# Altium PCB ESP32.PcbDoc
Units mil, origin at the board's own origin, x right, y up, seen from the top; angles counter-clockwise.
Board outline 1320 x 1320 mil, 2 copper layers (Top Layer, Bottom Layer); 27 components, 49 nets, 191 pads, 36 vias.
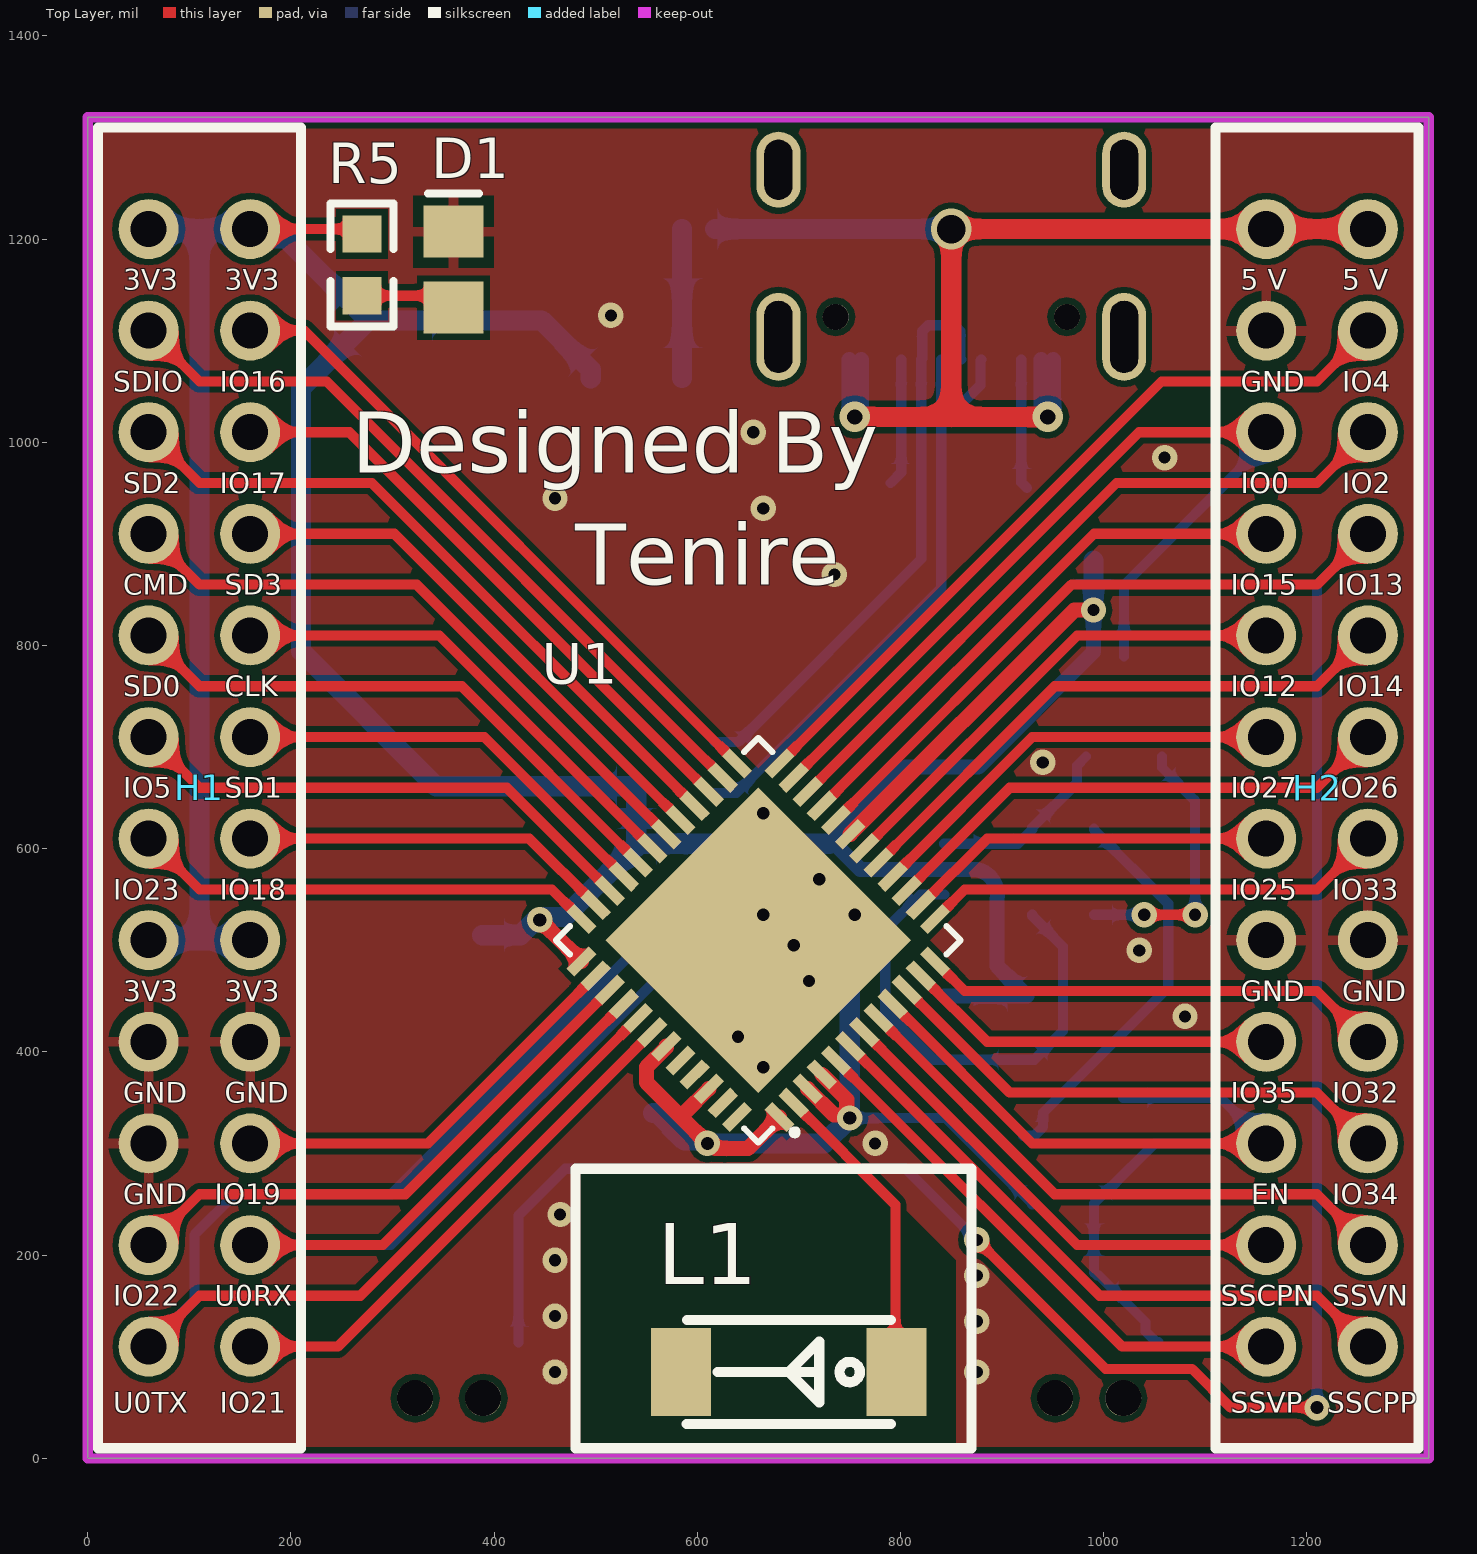
[diagram p0: Top Layer view]
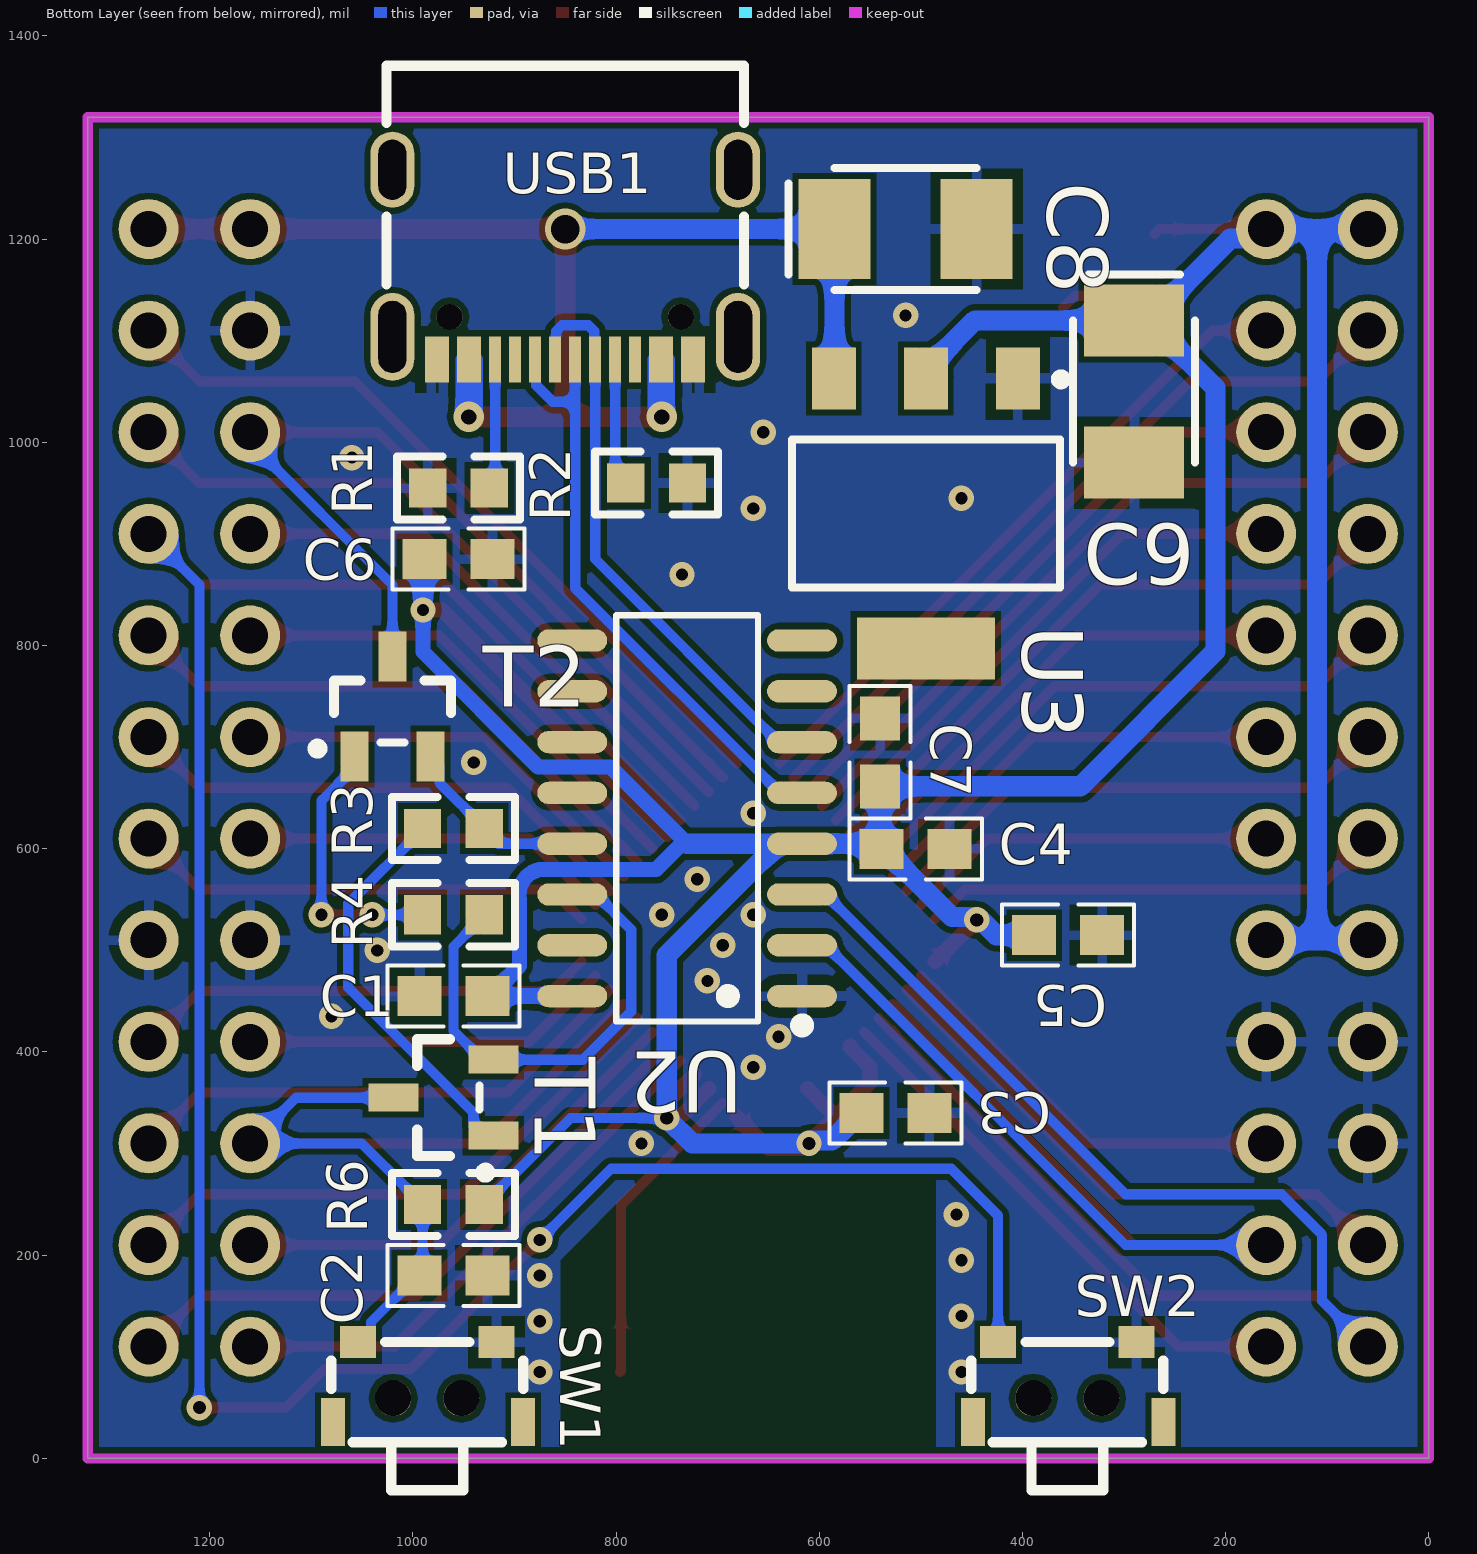
[diagram p1: Bottom Layer view, seen from below]

## Layer stack, top to bottom
Top Solder: solder mask 0.4, Solder Resist, Dk 3.5
Top Layer: signal copper 1.4
Dielectric 1: dielectric 12.6, FR-4, Dk 4.8
Bottom Layer: signal copper 1.4
Bottom Solder: solder mask 0.4, Solder Resist, Dk 3.5

## Board outline
0,0 0,1320 1320,1320 1320,0

## Design rules (kind name [scope] priority, off if disabled: settings)
Clearance [All] p1: gap=6 ignorepadtopadclearanceinfootprint=TRUE except(0: Arc-Hole Track-Hole SMDPad-Hole THPad-Hole Via-Hole Fill-Hole Poly-Hole Region-Hole Text-Hole)
HoleSize [All] p1: absolutevalues=TRUE maxlimit=248 minlimit=8 maxpercent=80.000 minpercent=20.000
MinimumSolderMaskSliver [All] p1: minsoldermaskwidth=0
PolygonConnect [All] p1: thpad.connectstyle=Relief thpad.reliefconductorwidth=10 thpad.reliefentries=4 thpad.polygonreliefangle="90 Angle" thpad.airgapwidth=10 smdpad.connectstyle=Relief smdpad.reliefconductorwidth=10 smdpad.reliefentries=4 smdpad.polygonreliefangle="90 Angle" smdpad.airgapwidth=10 via.connectstyle=Direct via.reliefconductorwidth=10 via.reliefentries=4 via.polygonreliefangle="90 Angle" via.airgapwidth=10
RoutingVias [All] p1: holewidth=16 width=28 viastyle="Through Hole" minholewidth=12 minwidth=25 maxholewidth=24 maxwidth=40
SilkToSilkClearance [All] p1: silktosilkclearance=0
SilkToSolderMaskClearance [IsPad] p1: minsilkscreentomaskgap=0 clearancetoexposedcopper=TRUE
SolderMaskExpansion [All] p1: expansion=4 istentingtop=FALSE
UnRoutedNet [All] p1: checkbadconnections=TRUE
Width [All] p1: maxlimit=60 minlimit=10 preferedwidth=10 minimp=50.000000 maximp=50.000000 favimp=50.000000
25 further rules are at their usual default settings.

## Components (designator, comment, footprint, x,y, rotation, side; value= is the part's Value field where it differs from the comment)
C1 "Cap" 0603-C 960,455 r0 bottom value=0.1μF
C2 "Cap" 0603-C 960,180 r180 bottom value=10μF
C3 "Cap" 0603-C 525,340 r180 bottom value=0.1μF
C4 "Cap" 0603-C 505,600 r180 bottom value=0.1μF
C5 "Cap" 0603-C 355,515 r180 bottom value=0.1μF
C6 "Cap" 0603-C 955,885 r180 bottom value=0.1μF
C7 "Cap" 0603-C 540,695 r90 bottom value=10μF
C8 "Cap Pol" CAP-3528 515,1210 r180 bottom value=10uF
C9 "Cap Pol" CAP-3528 290,1050 r270 bottom value=22μF
D1 "LED0" LED_0805 360,1170 r90 top
H1 "HDR_2X12" HDR_2X12 110,660 r270 top
H2 "HDR_2X12" HDR_2X12 1210,660 r270 top
L1 "AN2051-245" ANT2051 690,85 r180 top
R1 "Res2" 0603_R 955,955 r180 bottom value=5.1kΩ
R2 "Res2" 0603_R 760,960 r180 bottom value=5.1kΩ
R3 "Res2" 0603_R 960,620 r0 bottom value=12kΩ
R4 "Res2" 0603_R 960,535 r180 bottom value=12kΩ
R5 "Res2" 0603_R 270,1174.68 r90 top value=5.1kΩ
R6 "Res2" 0603_R 960,250 r0 bottom value=10kΩ
SW1 "K2-1806SA-A3DW-04" KEY-SMD_K2-1806SA-AXXW-XX 985,75 r0 bottom
SW2 "K2-1806SA-A3DW-04" KEY-SMD_K2-1806SA-AXXW-XX 355,75 r0 bottom
T1 "triode" SOT-23-3三极管贴片 970,355 r90 bottom
T2 "triode" SOT-23-3三极管贴片 1020,740 r180 bottom
U1 "ESP32-PICO-D4" QFN-48_L7.0-W7.0-P0.50-BL-EP5.4 660,510 r45 top
U2 "CH340C" SOP-16_L10.0-W3.9-P1.27-LS6.0-BL 730,630 r90 bottom
U3 "AMS1117-3v3" SOT-223 495,930 r0 bottom
USB1 "TYPEC-307DSW-ACP16" USB-C-SMD_TYPEC-307DSW-ACP16 850,1175 r0 bottom

## Footprints (in the part's own frame and the unit in brackets; to place one, negate y for a bottom-side part, rotate by r counter-clockwise, add the part's x,y. Pads: shape width x height; smd on the part's side, far side on the other; paste and mask are expansions set on the pad)
0603-C [mm] "贴片带丝印"
  rect 1.1x1 smd: 1(-0.85,0) 2(0.85,0)
  silkscreen extent -1.65,-0.76 1.65,0.76, body extent -1.14,-0.38 1.14,0.38, height 1
0603_R [mm]
  rect 0.93x0.98 smd: 1(-0.77,0) 2(0.77,0)
  silkscreen extent -1.53,-0.79 1.54,0.79, body extent -0.85,-0.4 0.85,0.4, height 0.56
ANT2051 [mm]
  rect 1.5x2.2 smd: 1(-2.69,0) 2(2.69,0)
  silkscreen extent -2.56,-1.3 2.55,1.3
CAP-3528 [mm] "钽电容"
  rect 1.8x2.5 smd: 1(-1.778,0) 2(1.778,0)
  silkscreen extent -2.92,-1.52 1.78,1.52, body extent -1.91,-1.4 1.91,1.4, height 1.1
HDR_2X12 [mm] "2X12 排座"
  round 1.5 hole 0.9: 1(-13.97,-1.27) 2(-13.97,1.27) 3(-11.43,-1.27) 4(-11.43,1.27) 5(-8.89,-1.27) 6(-8.89,1.27) 7(-6.35,-1.27) 8(-6.35,1.27) 9(-3.81,-1.27) 10(-3.81,1.27) 11(-1.27,-1.27) 12(-1.27,1.27) 13(1.27,-1.27) 14(1.27,1.27) 15(3.81,-1.27) 16(3.81,1.27) 17(6.35,-1.27) 18(6.35,1.27) 19(8.89,-1.27) 20(8.89,1.27) 21(11.43,-1.27) 22(11.43,1.27) 23(13.97,-1.27) 24(13.97,1.27)
  silkscreen extent -16.51,-2.54 16.51,2.54
KEY-SMD_K2-1806SA-AXXW-XX [mm]
  rect 0.9x0.8 smd: 1(-1.71,-1) 2(1.75,-1)
  rect 0.6x1.2 smd: 3(-2.38,1) 4(2.38,1)
  round 0.9 hole 0.9 unplated: ""(-0.831,0.4) ""(0.871,0.4)
  silkscreen extent -2.38,-1 2.42,2.7
LED_0805 [mm] "贴片二极管"
  rect 1.3x1.5 smd: 1(-0.95,0) 2(0.95,0)
  silkscreen extent 1.91,-0.63 1.91,0.64
QFN-48_L7.0-W7.0-P0.50-BL-EP5.4 [mm]
  rect 0.28x0.8 smd: 1(-2.75,-3.5) 2(-2.25,-3.5) 3(-1.75,-3.5) 4(-1.25,-3.5) 5(-0.75,-3.5) 6(-0.25,-3.5) 7(0.25,-3.5) 8(0.75,-3.5) 9(1.25,-3.5) 10(1.75,-3.5) 11(2.25,-3.5) 12(2.75,-3.5) 25(2.75,3.5) 26(2.25,3.5) 27(1.75,3.5) 28(1.25,3.5) 29(0.75,3.5) 30(0.25,3.5) 31(-0.25,3.5) 32(-0.75,3.5) 33(-1.25,3.5) 34(-1.75,3.5) 35(-2.25,3.5) 36(-2.75,3.5)
  rect 0.8x0.28 smd: 13(3.5,-2.75) 14(3.5,-2.25) 15(3.5,-1.75) 16(3.5,-1.25) 17(3.5,-0.75) 18(3.5,-0.25) 19(3.5,0.25) 20(3.5,0.75) 21(3.5,1.25) 22(3.5,1.75) 23(3.5,2.25) 24(3.5,2.75) 37(-3.5,2.75) 38(-3.5,2.25) 39(-3.5,1.75) 40(-3.5,1.25) 41(-3.5,0.75) 42(-3.5,0.25) 43(-3.5,-0.25) 44(-3.5,-0.75) 45(-3.5,-1.25) 46(-3.5,-1.75) 47(-3.5,-2.25) 48(-3.5,-2.75)
  rect 5.4x5.4 smd: 49(0,0)
  silkscreen extent -3.58,-4.11 3.58,3.58
SOP-16_L10.0-W3.9-P1.27-LS6.0-BL [mm]
  oval 0.56x1.745 smd: 1(-4.445,-2.873) 2(-3.175,-2.873) 3(-1.905,-2.873) 4(-0.635,-2.873) 5(0.635,-2.873) 6(1.905,-2.873) 7(3.175,-2.873) 8(4.445,-2.873) 9(4.445,2.873) 10(3.175,2.873) 11(1.905,2.873) 12(0.635,2.873) 13(-0.635,2.873) 14(-1.905,2.873) 15(-3.175,2.873) 16(-4.445,2.873)
  silkscreen extent -5.33,-3.02 5.08,1.77
SOT-23-3三极管贴片 [mm] "FMMT618"
  rect 0.7x1.25 smd: 1(-0.95,-1.25) 2(0.95,-1.25) 3(0,1.25)
  silkscreen extent -2,-1.17 1.46,0.65, body extent -1.5,-1.5 1.5,1.5, height 1.3
SOT-223 [mm]
  rect 1.1x1.55 smd: 1(-2.3,-3.375) 2(0,-3.375) 3(2.3,-3.375)
  rect 3.45x1.55 smd: 4(0,3.375)
  silkscreen extent -3.5,-3.48 3.35,1.85, body extent -3.3,-3.94 3.3,3.43, height 0.8
USB-C-SMD_TYPEC-307DSW-ACP16 [mm]
  oval 1.1x2.2 hole 0.7 slot 1.8 at 90 deg: 17(-4.32,1.808) 20(4.32,1.808)
  oval 1.1x1.9 hole 0.7 slot 1.5 at 90 deg: 18(-4.32,-2.373) 19(4.32,-2.373)
  rect 0.3x1.15 smd: A1(-3.35,2.373) A4(-2.55,2.373) A5(-1.25,2.373) A6(-0.25,2.373) A7(0.25,2.373) A8(1.25,2.373) A9(2.55,2.372) A12(3.35,2.373) B1(3.05,2.373) B4(2.25,2.372) B5(1.75,2.373) B6(0.75,2.373) B7(-0.75,2.373) B8(-1.75,2.373) B9(-2.25,2.373) B12(-3.05,2.373)
  round 0.65 hole 0.65 unplated: ""(-2.89,1.308) ""(2.89,1.308)
  silkscreen extent -4.47,-4.97 4.47,0.49

## Part data
C1 C2 C3 C4 C5 C6 C7: "无极性电容", LatestRevisionDate=17-Jul-2002, LatestRevisionNote="Re-released for DXP Platform.", PackageReference=RAD-0.3, Published=8-Jun-2000, Publisher="Altium Limited"
C8 C9: "极性电容", LatestRevisionDate=17-Jul-2002, LatestRevisionNote="Re-released for DXP Platform.", PackageReference=RB7.6-15, Published=8-Jun-2000, Publisher="Altium Limited", Vol=16V
D1: "发光二极管", LatestRevisionDate=08-Jul-2005, LatestRevisionNote="Mech Layer 1 removed.", PackageReference=LED-0, Published=8-Jun-2000, Publisher="Altium Limited"
L1: BOM_JLCPCB Part Class="Extended Part", BOM_Manufacturer=Rainsun, BOM_Manufacturer Part=AN2051-245, BOM_Supplier=LCSC, BOM_Supplier Part=C99727, spicePre=L, spiceSymbolName=AN2051-245
R1 R2 R3 R4 R5 R6: library part Res, "Resistor", LatestRevisionDate=17-Jul-2002, LatestRevisionNote="Re-released for DXP Platform.", PackageDescription="Axial Device, Thru-Hole; 2 Leads; 0.4 in Pin Spacing", PackageReference=AXIAL-0.4, Published=8-Jun-2000, Publisher="Altium Limited"
SW1 SW2: BOM_JLCPCB Part Class="Extended Part", BOM_Manufacturer=韩国韩荣, BOM_Manufacturer Part=K2-1806SA-A3DW-04, BOM_Supplier=LCSC, BOM_Supplier Part=C2690015, Contributor=LCSC, spicePre=S, spiceSymbolName=K2-1806SA-A3DW-04
T1 T2: "NPN"
U1: BOM_JLCPCB Part Class="Extended Part", BOM_Manufacturer="Espressif Systems", BOM_Manufacturer Part=ESP32-PICO-D4, BOM_Supplier=LCSC, BOM_Supplier Part=C193707, Contributor=LCSC, spicePre=U, spiceSymbolName=ESP32-PICO-D4
U2: BOM_JLCPCB Part Class="Extended Part", BOM_Manufacturer=WCH, BOM_Manufacturer Part=CH340C, BOM_Supplier=LCSC, BOM_Supplier Part=C84681, spicePre=U, spiceSymbolName=CH340C
USB1: BOM_Manufacturer=XUNPU(讯普), BOM_Manufacturer Part=TYPEC-307DSW-ACP16, BOM_Supplier=LCSC, BOM_Supplier Part=C2840402, Contributor=LCSC, spicePre=U, spiceSymbolName=TYPEC-307DSW-ACP16

## Via types
v1: diameter 25, hole 12, Top Layer to Bottom Layer, 29 vias
v2: diameter 25, hole 13, Top Layer to Bottom Layer, 4 vias
v3: diameter 30, hole 15, Top Layer to Bottom Layer, 2 vias
v4: diameter 40, hole 28, Top Layer to Bottom Layer, 1 vias

## Nets (pads, with @x,y where several pads share a name; then routed paths per layer and width w, separated by ;. In a path a pad name is that pad's centre, name@x,y a point inside that pad or via, vN(x,y) a via of type N, cw(c..) or ccw(c..) an arc to the next point about the centre after c; other vN are vias at no path point)
3V3: C1.1 C3.1 C4.1 C5.1 C6.1 C7.1 C9.1 H1.1 H1.2 H1.15 H1.16 R5.2 R6.1 U1.1 U1.3 U1.4 U1.19 U1.37 U1.43 U1.46 U2.4 U2.16 U3.2 | length 4891.8
  Top Layer w10: H1.2 265,1210 R5.2 ; U1.37@485.88,489.12 U1.37 ; 580,340 587.43,340
  Top Layer w15: v2(445,530) U1.37@485.88,489.12 ; U1.43 569.51,404.65 550,385.13 550,370 580,340 v2(610,310) 612.71,310 617.71,305 649.88,305 U1.1 ; 587.43,340 U1.46 ; U1.3 734.69,337.87 747.13,337.87 747.13,353.27 U1.4 ; U1.19 971.07,835 v1(990,835)
  Bottom Layer w10: C9.1@276.22,1120 C9.1 ; v2@440.94,530 v2(445,530) v2@447.87,532.87 ; C4.1@536.5,600 C4.1 C4.1@540,601.54 ; C3.1 C3.1@560.43,340 ; v2@607.13,312.87 v2(610,310) ; v2(750,335) 844.69,335 915.39,264.29 916.38,264.29 929.69,250.98 R6.1 ; C1.1@924.57,455 C1.1 ; C6.1 C6.1@990,883.46
  Bottom Layer w15: U2.16 924.57,455 895,484.57 895,550 ccw(c870.24,554.76) 875,579.52 760.48,579.52 735,605 730,605 805.48,680.48 876.58,680.48 990,793.9 v1(990,835)
  Bottom Layer w20: H1.15 110,510 ; H1.1 110,1210 ; H1.16 110,510 ; C9.1 446.73,1120 495,1071.73 U3.2 ; C5.1 425.94,515 v2@440.94,530 ; v2@447.87,532.87 469.37,532.87 C4.1@536.5,600 ; C4.1@540,601.54 C7.1 342.76,661.54 210,794.3 210,1053.78 276.22,1120 195.61,1200.61 169.39,1200.61 H1.2 110,1210 ; C4.1@543.46,605 U2.4 U2.4@640.24,605 ; C3.1@556.5,340 C3.1 ; C3.1@560.43,340 587.56,312.87 v2@607.13,312.87 ; v2(610,310) 725,310 v2(750,335) 750,495.24 U2.4@640.24,605 ; 730,605 U2.4@640.24,605 ; v1(990,835) C6.1@990,883.46 ; 110,510 110,1210
5V0: C8.1 H2.1 H2.2 U3.3 USB1.A4 USB1.A9 USB1.B4 USB1.B9 | length 1373.3
  Top Layer w20: v3(755,1025) 850,1025 ; v3(945,1025) 850,1025 ; H2.2 H2.1 v4(850,1210) 850,1025
  Bottom Layer w10: U3.3@585,1063.42 U3.3 ; v3(755,1025) 755,1030.41 v3@761.42,1036.83 ; v3(945,1025) 945,1030.41 v3@950.4,1035.81
  Bottom Layer w15: v3@749.61,1035.8 USB1.A4 ; v3@761.42,1036.83 USB1.B9 ; v3@938.58,1036.83 USB1.B4 ; v3@950.4,1035.81 USB1.A9
  Bottom Layer w20: U3.3@585,1063.42 C8.1 ; C8.1@617.68,1210 v4(850,1210)
CH_RX: H1.23 U1.41 U2.3 | length 1395
  Top Layer w10: H1.23 110,160 268.23,160 U1.41
  Bottom Layer w10: H1.23 105,155 105,220 145,260 298.58,260 593.58,555 U2.3
CH_TX: H1.22 U1.40 U2.2 | length 1045.2
  Top Layer w10: H1.22 290.4,210 U1.40
  Bottom Layer w10: H1.22 298.58,210 593.58,505 U2.2
CLK: H1.10 U1.31 | length 482.4
  Top Layer w10: H1.10 346.08,810 U1.31
CMD: H1.7 U1.30 | length 632
  Top Layer w10: H1.7 110,860 323.91,860 U1.30
DN: U2.6 USB1.A7 USB1.B7 | length 573.3
  Bottom Layer w10: U2.6 640.24,705 820.47,885.23 USB1.B7 821.38,1082.5 821.38,1109.37 827.23,1115.23 853.08,1115.23 858.93,1109.37 858.93,1082.5 USB1.A7
DP: U2.5 USB1.A6 USB1.B6 | length 602.7
  Bottom Layer w10: U2.5 638.62,655 840.16,856.54 840.16,1040 ; USB1.A6 840.16,1040 ; USB1.B6 878.62,1080.69 878.62,1056.28 862.35,1040 840.16,1040
DTR: R3.1 T2.2 U2.13 | length 186.1
  Bottom Layer w10: U2.13 915.67,605 929.69,619.02 R3.1 929.69,620.98 973.82,665.12 973.82,682.01 T2.2
EN: C2.1 H2.19 R6.2 SW1.2 T1.3 U1.9 | length 943.5
  Top Layer w10: U1.9 929.59,310 H2.19
  Bottom Layer w10: T1.3 1115,355 H2.19 1050.32,310 1004.61,264.29 1003.62,264.29 990.32,250.98 R6.2 990.32,183.15 C2.1 995.43,180 1041.18,134.25 1041.18,125.12 1051.93,114.37 SW1.2
GND: C1.2 C2.2 C3.2 C4.2 C5.2 C6.2 C7.2 C8.2 C9.2 D1.2 H1.17 H1.18 H1.19 H2.3 H2.15 H2.16 R1.1 R2.2 SW1.1 SW2.1 U1.49 U2.1 U3.1 USB1.A1 USB1.A12 USB1.B1 USB1.B12
  other v1: 460,85 875,85 875,135 460,140 875,180 460,195 465,240 775,310 665,385 640,415 1080,435 710,470 1035,500 695,505 665,535 755,535 720,570 665,635 940,685 735,870 665,935 460,945 1060,985 655,1010 515,1125
IO0: H2.5 T2.3 U1.23 | length 884.8
  Top Layer w10: U1.23 1034.72,1010 H2.5
  Bottom Layer w10: T2.3 1020,859.64 1160,999.64 H2.5
IO2: H2.6 U1.22 | length 697.9
  Top Layer w10: U1.22 1012.55,960 1210,960 H2.6
IO4: H2.4 U1.24 | length 755.6
  Top Layer w10: U1.24 1056.87,1060 1210,1060 H2.4
IO5: H1.11 U1.34 | length 516.5
  Top Layer w10: H1.11 110,660 412.55,660 U1.34
IO12: H2.9 U1.18 | length 482.4
  Top Layer w10: U1.18 973.91,810 H2.9
IO13: H2.8 SW2.2 U1.20 | length 2547.9
  Top Layer w10: U1.20 968.23,860 1210,860 H2.8 ; v1(875,215) 1002.01,87.99 1087.01,87.99 1125,50 v2(1210,50)
  Bottom Layer w10: SW2.2 423.9,238.9 470,285 805,285 v1(875,215) ; v2(1210,50) 1210,860 H2.8
IO14: H2.10 U1.17 | length 574.2
  Top Layer w10: U1.17 951.75,760 1210,760 H2.10
IO15: H2.7 U1.21 | length 548.3
  Top Layer w10: U1.21 990.4,910 H2.7
IO16: H1.4 U1.25 | length 655.6
  Top Layer w10: H1.4 213.11,1110 U1.25
IO17: H1.6 U1.27 | length 597.9
  Top Layer w10: H1.6 257.43,1010 U1.27
IO18: H1.14 U1.35 | length 366.9
  Top Layer w10: H1.14 434.72,610 U1.35
IO19: H1.20 U1.38 | length 408.4
  Top Layer w10: H1.20 334.72,310 U1.38
IO21: H1.24 U1.42 | length 523.8
  Top Layer w10: H1.24 246.08,110 U1.42
IO22: H1.21 U1.39 | length 557.9
  Top Layer w10: H1.21 110,260 312.55,260 U1.39
IO23: H1.13 U1.36 | length 458.8
  Top Layer w10: H1.13 110,560 456.88,560 U1.36
IO25: H2.13 U1.14 | length 366.9
  Top Layer w10: U1.14 885.26,610 H2.13
IO26: H2.12 U1.15 | length 516.5
  Top Layer w10: U1.15 907.43,660 1210,660 H2.12
IO27: H2.11 U1.16 | length 424.7
  Top Layer w10: U1.16 929.58,710 H2.11
IO32: H2.18 U1.12 | length 458.8
  Top Layer w10: U1.12 863.11,460 1210,460 H2.18
IO33: H2.14 U1.13 | length 458.8
  Top Layer w10: U1.13 863.11,560 1210,560 H2.14
IO34: H2.20 U1.10 | length 516.5
  Top Layer w10: U1.10 907.43,360 1210,360 H2.20
IO35: H2.17 U1.11 | length 366.9
  Top Layer w10: U1.11 885.27,410 H2.17
NetD1_1: D1.1 R5.1 | length 94.9
  Top Layer w10: R5.1 348.23,1144.37 D1.1
NetL1_1: L1.1 U1.2 | length 306.8
  Top Layer w10: U1.2 795,249.72 795,85.91 L1.1
NetR1_2: R1.2 USB1.B5 | length 129
  Bottom Layer w10: USB1.B5 918.9,960.78 R1.2
NetR2_1: R2.1 USB1.A5 | length 125.9
  Bottom Layer w10: R2.1 800.79,970.48 USB1.A5
NetR3_2: R3.2 T1.1 | length 398.2
  Bottom Layer w10: T1.1 931.61,317.6 940.39,326.38 940.39,340.39 1063.5,463.5 1063.5,545.83 990.32,619.02 R3.2
NetR4_1: R4.1 T2.1 | length 269
  Top Layer w10: v1(1040,535) v1(1090,535)
  Bottom Layer w10: R4.1 v1(1040,535) ; T2.1 1057.4,679.96 1086,651.36 1090,647.36 v1(1090,535)
RTS: R4.2 T1.2 U2.14 | length 486
  Bottom Layer w10: U2.14 819.76,555 785,520.24 785,440 832.6,392.4 T1.2 931.61,392.4 960,420.79 960,503.7 929.68,534.02 R4.2
SD0: H1.9 U1.32 | length 574.2
  Top Layer w10: H1.9 110,760 368.23,760 U1.32
SD1: H1.12 U1.33 | length 424.7
  Top Layer w10: H1.12 390.4,710 U1.33
SD2: H1.5 U1.28 | length 689.7
  Top Layer w10: H1.5 110,960 279.59,960 U1.28
SD3: H1.8 U1.29 | length 540.1
  Top Layer w10: H1.8 301.75,910 U1.29
SS_CAPN: H2.21 U1.7 | length 482.4
  Top Layer w10: U1.7 973.91,210 H2.21
SS_CAPP: H2.24 U1.6 | length 632
  Top Layer w10: U1.6 996.08,160 1210,160 H2.24
SS_VN: H2.22 U1.8 | length 574.2
  Top Layer w10: U1.8 951.76,260 1210,260 H2.22
SS_VP: H2.23 U1.5 | length 540.1
  Top Layer w10: U1.5 1018.23,110 H2.23
VDD_SDIO: H1.3 U1.26 | length 747.4
  Top Layer w10: H1.3 110,1060 235.26,1060 U1.26
pads on no net: L1.2 SW1. SW1.3 SW1.4 SW2. SW2.3 SW2.4 U1.44 U1.45 U1.47 U1.48 U2.7 U2.8 U2.9 U2.10 U2.11 U2.12 U2.15 U3.4 USB1. USB1.17 USB1.18 USB1.19 USB1.20 USB1.A8 USB1.B8

## Polygon pours and split planes (outlines as drawn)
GND on Bottom Layer "GND_L02_P019" (solid, pour order 19): 1320,0 1320,1320 0,1320 0,0 5,5 485,5 485,280 770,280 855,195 855,0
no net on Bottom Layer "NONET_L02_P009" (solid, pour order 9): -5,1325
no net on Bottom Layer "NONET_L02_P002" (solid, pour order 2): 110,1365
no net on Bottom Layer "NONET_L02_P000" (solid, pour order 0): 855,575
GND on Top Layer "GND_L01_P018" (solid, pour order 18): 1320,0 1320,1320 0,1320 0,0 485,0 485,280 770,280 855,195 855,0

## Keep-outs
Keep-Out Layer:
  the board outline again, w10

## Silkscreen, mask and mechanical layers (free items; w line width, h text height)
Top Overlay:
  lines w10: 480,10 870,10 870,285 480,285 480,10
  text "3V3" at 35,1150 h20
  text "3V3" at 135,1150 h20
  text "5 V" at 1135,1150 h20
  text "5 V" at 1235,1150 h20
  text "SDIO" at 25,1050 h20
  text "IO16" at 130,1050 h20
  text "GND" at 1135,1050 h20
  text "IO4" at 1235,1050 h20
  text "Designed By" at 260,969.99 h60
  text "SD2" at 35,950 h20
  text "IO17" at 130,950 h20
  text "IO0" at 1135,950 h20
  text "IO2" at 1235,950 h20
  text "Tenire" at 480,860 h60
  text "CMD" at 35,850 h20
  text "SD3" at 135,850 h20
  text "IO15" at 1125,850 h20
  text "IO13" at 1230,850 h20
  text "SD0" at 35,750 h20
  text "CLK" at 135,750 h20
  text "IO12" at 1125,750 h20
  text "IO14" at 1230,750 h20
  text "IO5" at 35,650 h20
  text "SD1" at 135,650 h20
  text "IO27" at 1125,650 h20
  text "IO26" at 1225,650 h20
  text "IO23" at 25,550 h20
  text "IO18" at 130,550 h20
  text "IO25" at 1125,550 h20
  text "IO33" at 1225,550 h20
  text "3V3" at 35,450 h20
  text "3V3" at 135,450 h20
  text "GND" at 1135,450 h20
  text "GND" at 1235,450 h20
  text "GND" at 35,350 h20
  text "GND" at 135,350 h20
  text "IO35" at 1125,350 h20
  text "IO32" at 1225,350 h20
  text "GND" at 35,250 h20
  text "IO19" at 125,250 h20
  text "EN" at 1145,250 h20
  text "IO34" at 1225,250 h20
  text "IO22" at 25,150 h20
  text "U0RX" at 125,150 h20
  text "SSCPN" at 1115,150 h20
  text "SSVN" at 1225,150 h20
  text "U0TX" at 25,45 h20
  text "IO21" at 130,45 h20
  text "SSVP" at 1125,45 h20
  text "SSCPP" at 1220,45 h20